# EAGLE board _X2 (EAGLE 8.4.0)
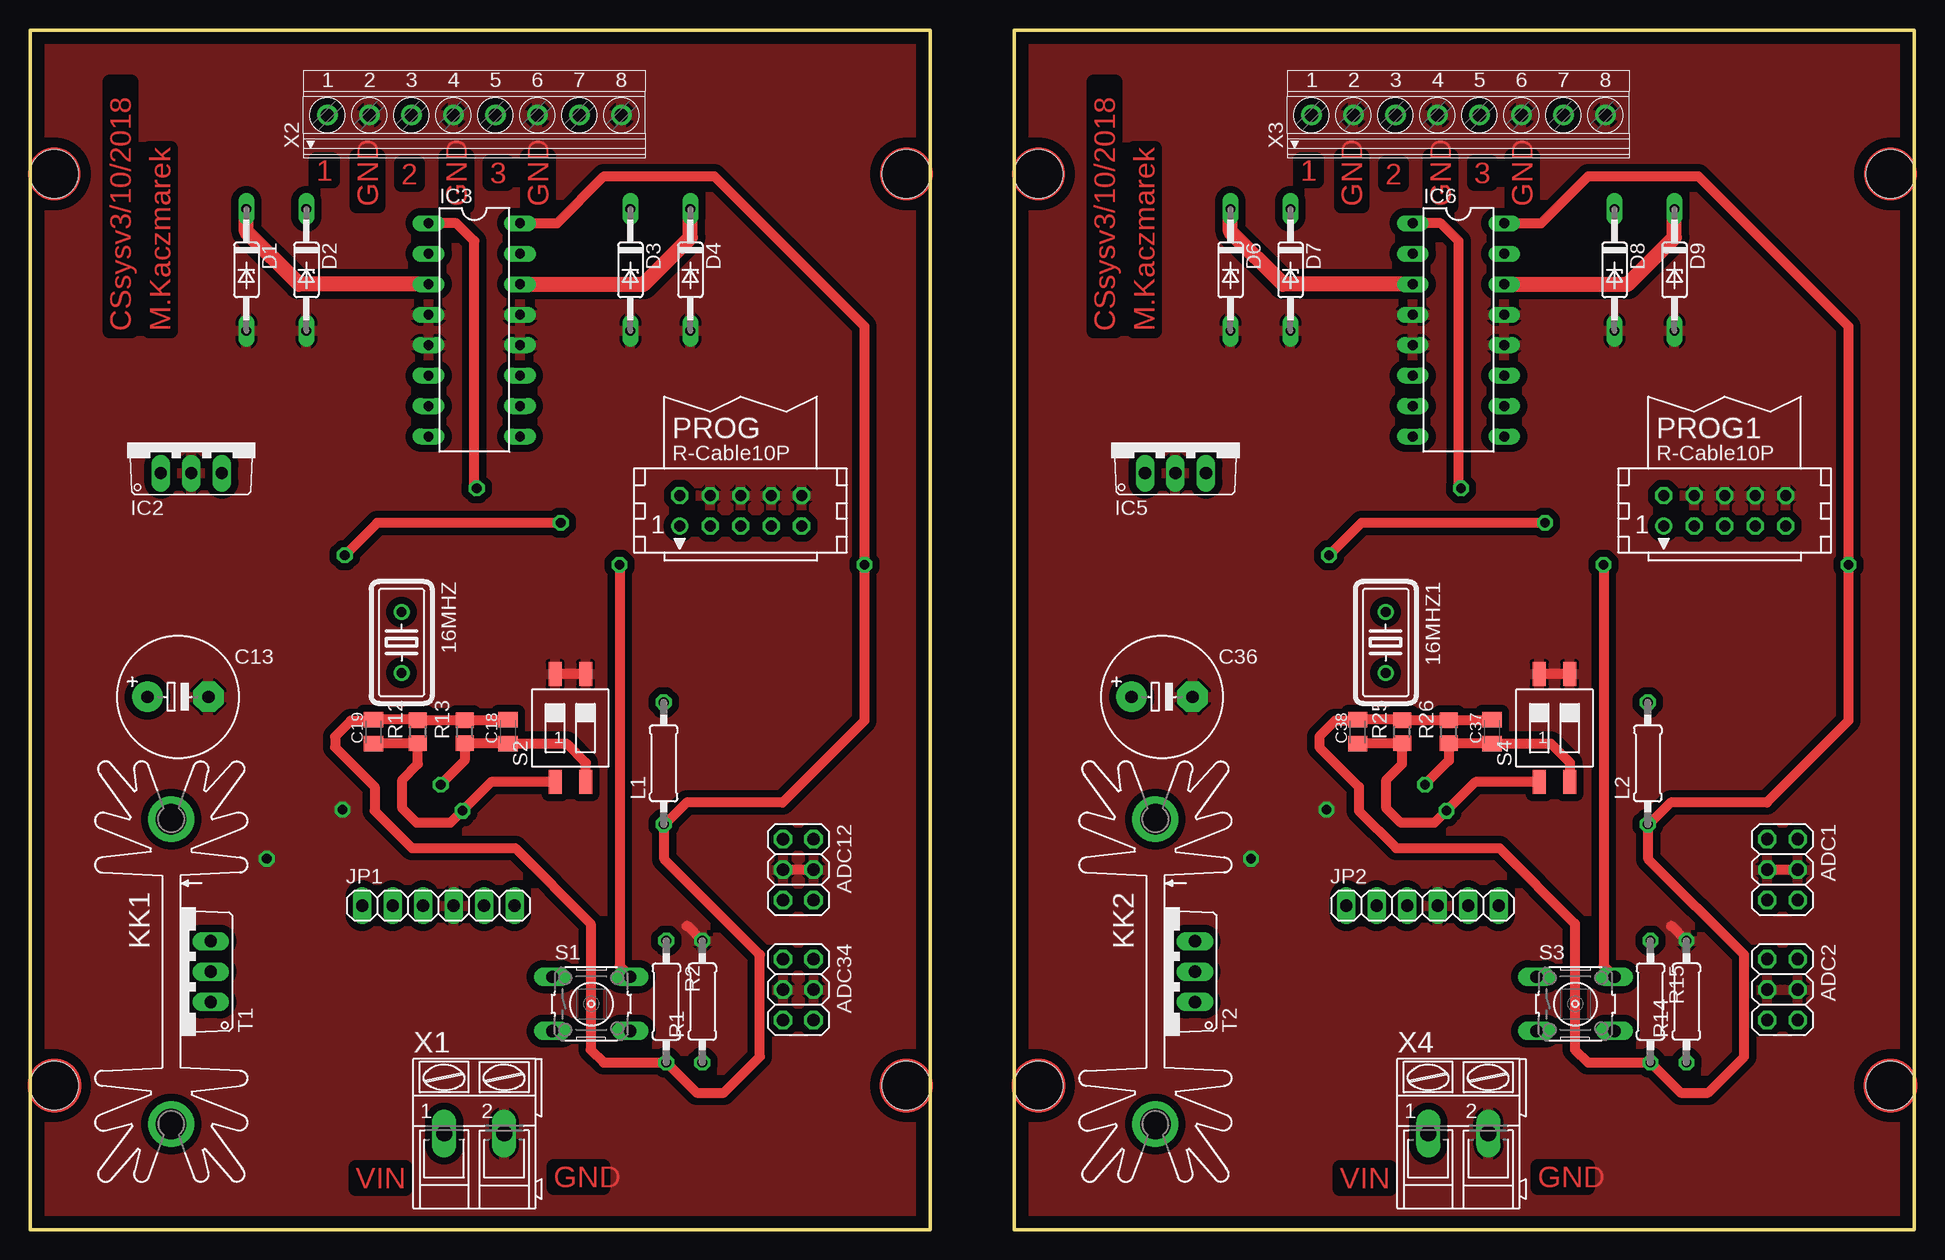
[diagram p0: board, top side]
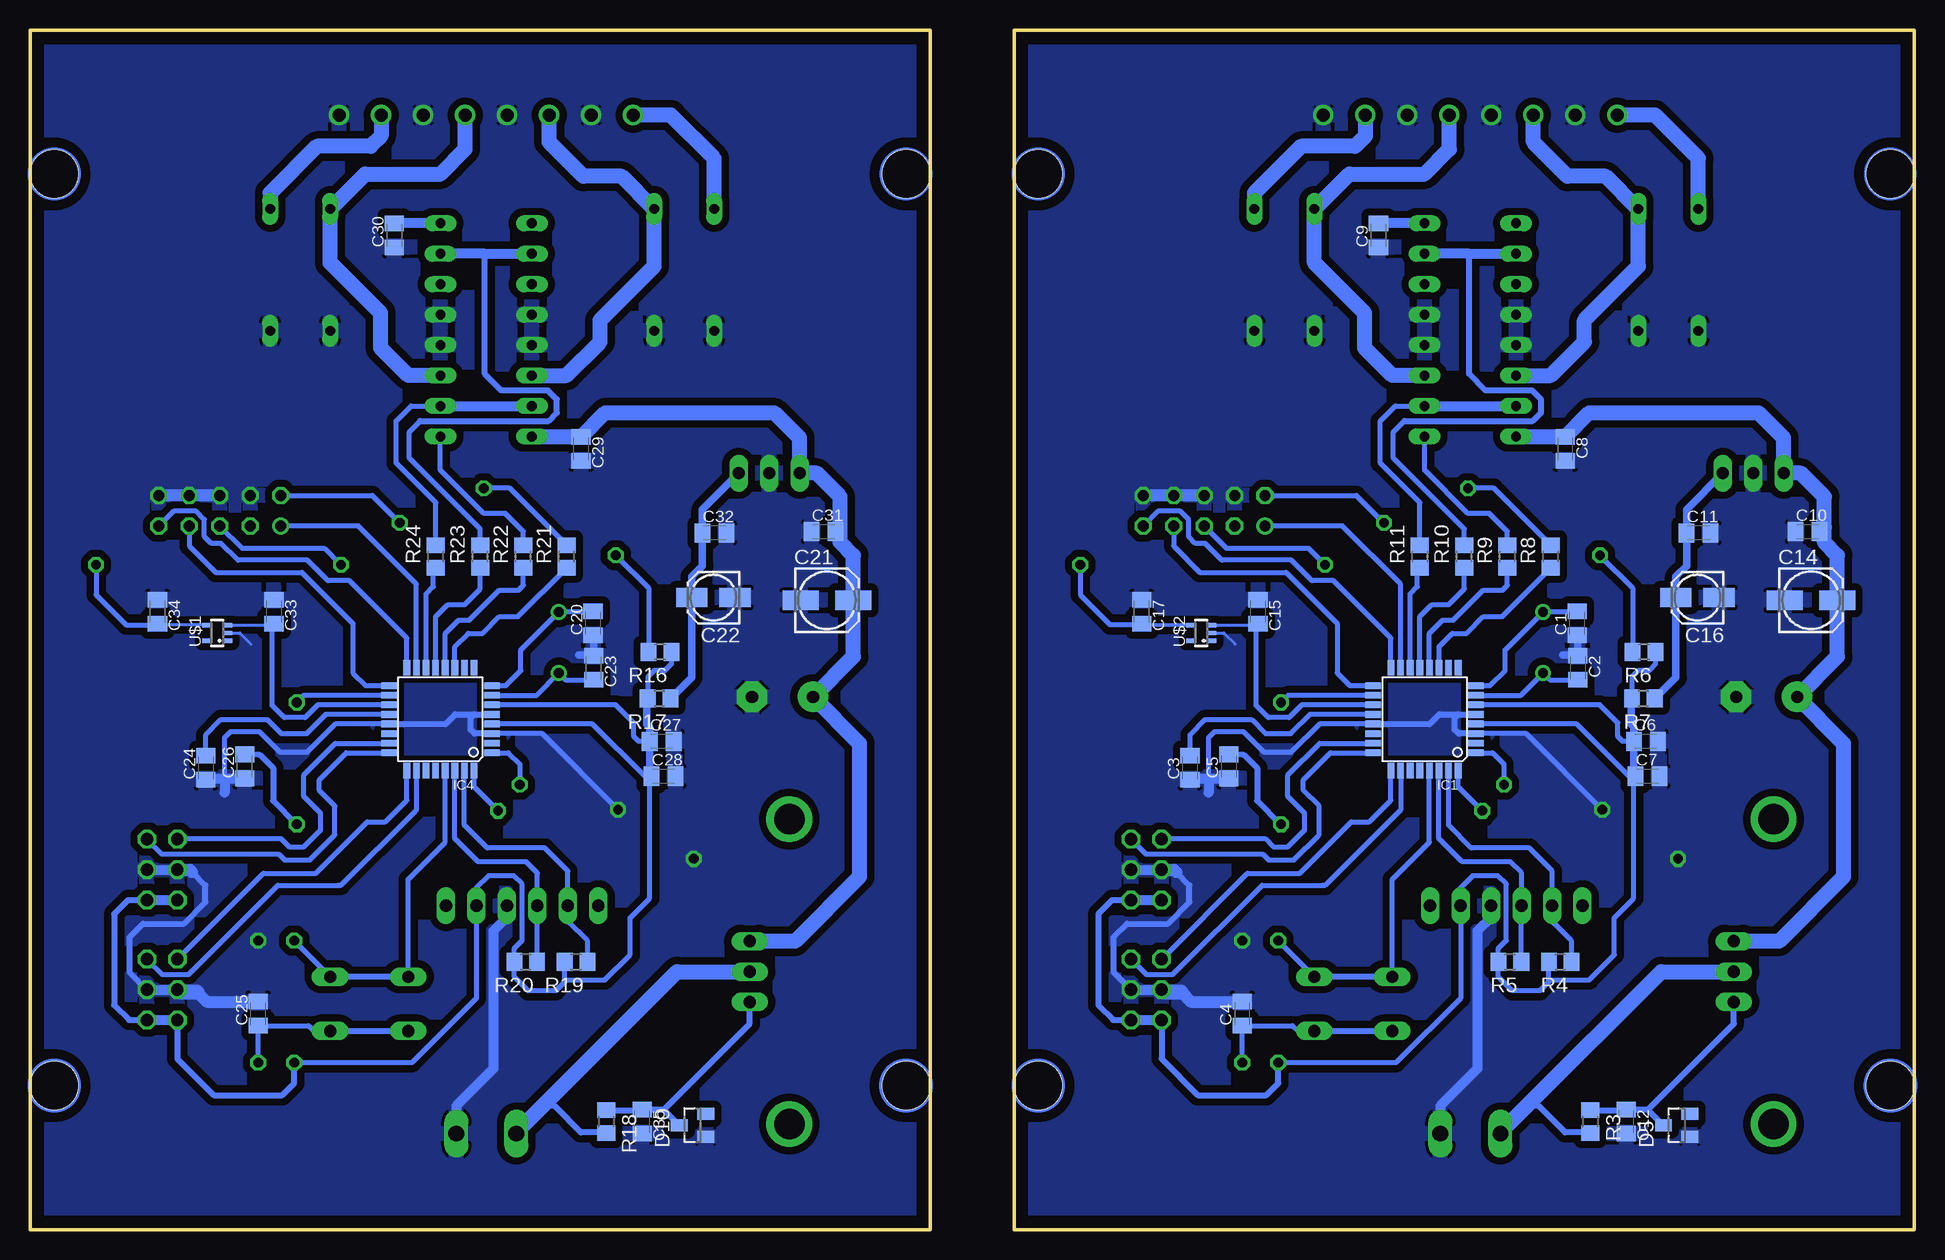
[diagram p1: board, bottom side, seen from below]

Size 157.01 x 100 mm. Coordinates in mm from the lower left corner, seen from the top.
Outline: 0,0 75,0 75,100 0,100 0,0
Outline: 82.01,0 157.01,0 157.01,100 82.01,100 82.01,0
Copper layers (1*16): Top 0.035mm / dielectric 1.5mm / Bottom 0.035mm
Design rules "default": minimum track width 6mil, minimum drill 0.35mm, track to track 6mil, track to pad 6mil, pad to pad 6mil, via to via 6mil, smd to smd 6mil, copper to edge 40mil, drill to drill 6mil, minimum pad ring 10mil, minimum via ring 8mil, stop-mask expansion 4mil, vias tented up to drill 0mil, thermal gap 10mil
Holes 4 mm at 2,12 73,12 73,88 2,88 84.01,12 155.01,12 155.01,88 84.01,88

## Footprints (pad centres in the part's own frame; a part is rotated, then mirrored left to right if it is on the bottom)
HC18U-V = drill 0.813: 1 -2.54,0; 2 2.54,0
2X03 = drill 1.016 octagon: 1 -2.54,-1.27; 2 -2.54,1.27; 3 0,-1.27; 4 0,1.27; 5 2.54,-1.27; 6 2.54,1.27
C0805K = smd 1.3 x 1.6: 1 -1,0; 2 1,0
E5-10,5 = drill 1.016 pad 2.54: + -2.54,0 | drill 1.016 pad 2.54 octagon: - 2.54,0
153CLV-0505 = smd 3 x 1.6: + 2.2,0; - -2.2,0
153CLV-0405 = smd 2.6 x 1.6: + 1.8,0; - -1.8,0
DO35Z10 = drill 0.813 long: A 5.08,0; C -5.08,0
SOT23 = smd 1 x 1.4: 1 -0.95,-1.1; 2 0.95,-1.1; 3 0,1.1
TQFP32-08 = smd 1.27 x 0.559: 1 -4.293,2.8; 2 -4.293,2; 3 -4.293,1.2; 4 -4.293,0.4; 5 -4.293,-0.4; 6 -4.293,-1.2; 7 -4.293,-2; 8 -4.293,-2.8; 17 4.293,-2.8; 18 4.293,-2; 19 4.293,-1.2; 20 4.293,-0.4; 21 4.293,0.4; 22 4.293,1.2; 23 4.293,2; 24 4.293,2.8 | smd 0.559 x 1.27: 9 -2.8,-4.293; 10 -2,-4.293; 11 -1.2,-4.293; 12 -0.4,-4.293; 13 0.4,-4.293; 14 1.2,-4.293; 15 2,-4.293; 16 2.8,-4.293; 25 2.8,4.293; 26 2,4.293; 27 1.2,4.293; 28 0.4,4.293; 29 -0.4,4.293; 30 -1.2,4.293; 31 -2,4.293; 32 -2.8,4.293
TO220V = drill 1.016 long: 1 -2.54,-2.54; 2 0,-2.54; 3 2.54,-2.54
DIL16 = drill 0.813 long: 1 -8.89,-3.81; 2 -6.35,-3.81; 3 -3.81,-3.81; 4 -1.27,-3.81; 5 1.27,-3.81; 6 3.81,-3.81; 7 6.35,-3.81; 8 8.89,-3.81; 9 8.89,3.81; 10 6.35,3.81; 11 3.81,3.81; 12 1.27,3.81; 13 -1.27,3.81; 14 -3.81,3.81; 15 -6.35,3.81; 16 -8.89,3.81
1X06 = drill 1.016 long: 1 -6.35,0; 2 -3.81,0; 3 -1.27,0; 4 1.27,0; 5 3.81,0; 6 6.35,0
SK104-PAD = drill 2.54 pad 3.81: K1 -12.7,-0.762; K2 12.7,-0.762
0207/10 = drill 0.813 octagon: 1 -5.08,0; 2 5.08,0
CON10 = drill 0.914: 1 -5.08,-1.27 | drill 0.914 octagon: 2 -5.08,1.27; 3 -2.54,-1.27; 4 -2.54,1.27; 5 0,-1.27; 6 0,1.27; 7 2.54,-1.27; 8 2.54,1.27; 9 5.08,-1.27; 10 5.08,1.27
R0805 = smd 1.3 x 1.5: 1 -0.95,0; 2 0.95,0
B3F-10XX = drill 1.016 long: 1 -3.251,2.261; 2 3.251,2.261; 3 -3.251,-2.261; 4 3.251,-2.261
SMS-002 = smd 1.092 x 2.007: 1 -1.27,-4.496; 2 1.27,-4.496; 3 1.27,4.496; 4 -1.27,4.496
TO220AV = drill 1.016 long: 1 -2.54,-2.54; 2 0,-2.54; 3 2.54,-2.54
SC70-5L = smd 0.35 x 0.8: 1 -0.65,-0.85; 2 0,-0.85; 3 0.65,-0.85; 4 0.65,0.85; 5 -0.65,0.85
AK300/2 = drill 1.321 long: 1 -2.515,0; 2 2.489,0
1751303 = drill 1.1 pad 1.7: 1 -12.25,-0.1; 2 -8.75,-0.1; 3 -5.25,-0.1; 4 -1.75,-0.1; 5 1.75,-0.1; 6 5.25,-0.1; 7 8.75,-0.1; 8 12.25,-0.1

## Placement (x,y rotation side)
16MHZ  [HC18U-V]  30.94,48.94 270 top
16MHZ1  [HC18U-V]  112.95,48.94 270 top
ADC1  ADC01  [2X03]  146.01,30 270 top
ADC2  ADC23  [2X03]  146.01,20 270 top
ADC12  ADC01  [2X03]  64,30 270 top
ADC34  ADC23  [2X03]  64,20 270 top
C1  22P  [C0805K]  28.09,50.54 90 bottom
C2  22P  [C0805K]  28.04,46.83 270 bottom
C3  100n  [C0805K]  60.36,38.51 90 bottom
C4  100n  [C0805K]  56,18 90 bottom
C5  100n  [C0805K]  57.12,38.61 90 bottom
C6  100n  [C0805K]  22.37,40.7 0 bottom
C7  100n  [C0805K]  22.22,37.8 0 bottom
C8  1u  [C0805K]  29.09,65.08 270 bottom
C9  100n  [C0805K]  44.65,82.88 90 bottom
C10  100n  [C0805K]  8.88,58.18 0 bottom
C11  100n  [C0805K]  17.98,58.07 0 bottom
C12  1uF  [C0805K]  24,9 270 bottom
C13  470uF  [E5-10,5]  12.3,44.4 0 top
C14  10u  [153CLV-0505]  8.6,52.46 0 bottom
C15  22P  [C0805K]  54.68,51.51 270 bottom
C16  1u  [153CLV-0405]  18.07,52.68 180 bottom
C17  22P  [C0805K]  64.39,51.51 270 bottom
C18  100n  [C0805K]  39.8,41.5 90 top
C19  100n  [C0805K]  28.6,41.5 90 top
C20  22P  [C0805K]  110.1,50.54 90 bottom
C21  10u  [153CLV-0505]  90.61,52.46 0 bottom
C22  1u  [153CLV-0405]  100.08,52.68 180 bottom
C23  22P  [C0805K]  110.05,46.83 270 bottom
C24  100n  [C0805K]  142.37,38.51 90 bottom
C25  100n  [C0805K]  138.01,18 90 bottom
C26  100n  [C0805K]  139.13,38.61 90 bottom
C27  100n  [C0805K]  104.38,40.7 0 bottom
C28  100n  [C0805K]  104.23,37.8 0 bottom
C29  1u  [C0805K]  111.1,65.08 270 bottom
C30  100n  [C0805K]  126.66,82.88 90 bottom
C31  100n  [C0805K]  90.89,58.18 0 bottom
C32  100n  [C0805K]  99.99,58.07 0 bottom
C33  22P  [C0805K]  136.69,51.51 270 bottom
C34  22P  [C0805K]  146.4,51.51 270 bottom
C35  1uF  [C0805K]  106.01,9 270 bottom
C36  470uF  [E5-10,5]  94.31,44.4 0 top
C37  100n  [C0805K]  121.81,41.5 90 top
C38  100n  [C0805K]  110.61,41.5 90 top
D1  [DO35Z10]  18,80 270 top
D2  [DO35Z10]  23,80 270 top
D3  [DO35Z10]  50,80 270 top
D4  [DO35Z10]  55,80 270 top
D5  13V  [SOT23]  19.8,8.7 90 bottom
D6  [DO35Z10]  100.01,80 270 top
D7  [DO35Z10]  105.01,80 270 top
D8  [DO35Z10]  132.01,80 270 top
D9  [DO35Z10]  137.01,80 270 top
D10  13V  [SOT23]  101.81,8.7 90 bottom
IC1  MEGA8-AI  [TQFP32-08]  40.81,42.54 180 bottom
IC2  7805TV  [TO220V]  13.42,65.59 0 top
IC3  L293D  [DIL16]  37,75 270 top
IC4  MEGA8-AI  [TQFP32-08]  122.82,42.54 180 bottom
IC5  7805TV  [TO220V]  95.43,65.59 0 top
IC6  L293D  [DIL16]  119.01,75 270 top
JP1  UART  [1X06]  34,27 0 top
JP2  UART  [1X06]  116.01,27 0 top
KK1  SK104-PAD  [SK104-PAD]  12.5,21.5 270 top
KK2  SK104-PAD  [SK104-PAD]  94.51,21.5 270 top
L1  10u  [0207/10]  52.78,38.86 90 top
L2  10u  [0207/10]  134.79,38.86 90 top
PROG  SPI-Prog  [CON10]  59.19,59.92 0 top
PROG1  SPI-Prog  [CON10]  141.2,59.92 0 top
R1  100  [0207/10]  56,19 90 top
R2  10k  [0207/10]  53,19 270 top
R3  1.1k  [R0805]  27,9 270 bottom
R4  4,7k  [R0805]  29.5,22.3 180 bottom
R5  4,7k  [R0805]  33.7,22.3 180 bottom
R6  0  [R0805]  22.52,48.14 180 bottom
R7  0  [R0805]  22.58,44.25 180 bottom
R8  1k  [R0805]  30.3,56.1 90 bottom
R9  1k  [R0805]  33.9,56.1 90 bottom
R10  1k  [R0805]  37.5,56.1 90 bottom
R11  1k  [R0805]  41.2,56.1 90 bottom
R12  10k  [R0805]  32.3,41.5 90 top
R13  10k  [R0805]  36.2,41.5 90 top
R14  100  [0207/10]  138.01,19 90 top
R15  10k  [0207/10]  135.01,19 270 top
R16  0  [R0805]  104.53,48.14 180 bottom
R17  0  [R0805]  104.59,44.25 180 bottom
R18  1.1k  [R0805]  109.01,9 270 bottom
R19  4,7k  [R0805]  111.51,22.3 180 bottom
R20  4,7k  [R0805]  115.71,22.3 180 bottom
R21  1k  [R0805]  112.31,56.1 90 bottom
R22  1k  [R0805]  115.91,56.1 90 bottom
R23  1k  [R0805]  119.51,56.1 90 bottom
R24  1k  [R0805]  123.21,56.1 90 bottom
R25  10k  [R0805]  114.31,41.5 90 top
R26  10k  [R0805]  118.21,41.5 90 top
S1  [B3F-10XX]  46.75,18.81 0 top
S2  SWS002  [SMS-002]  45,41.8 0 top
S3  [B3F-10XX]  128.76,18.81 0 top
S4  SWS002  [SMS-002]  127.01,41.8 0 top
T1  ST13007  [TO220AV]  12.5,21.5 90 top
T2  ST13007  [TO220AV]  94.51,21.5 90 top
U$1  MCP9701  [SC70-5L]  141.42,49.73 90 bottom
U$2  MCP9701  [SC70-5L]  59.41,49.73 90 bottom
X1  [AK300/2]  37,8 0 top
X2  1751303  [1751303]  37,93 0 top
X3  1751303  [1751303]  119.01,93 0 top
X4  [AK300/2]  119.01,8 0 top

## Library data of the parts
16MHZ 16MHZ1 = crystal; OC_FARNELL: unknown; OC_NEWARK: unknown
ADC1 ADC2 ADC12 ADC34 JP1 JP2 = pinhead
C1-C38 L1 L2 R1-R26 = resistor
D1-D10 = diode
IC1 IC4 = atmel; MPN: ATMEGA8-16AU; OC_FARNELL: 9171371; OC_NEWARK: 73M8863
IC2 IC5 = linear
IC3 IC6 = st-microelectronics; MPN: L293D; OC_FARNELL: 9589619; OC_NEWARK: 56P8249
KK1 KK2 = heatsink
PROG PROG1 = con-harting; OC_FARNELL: unknown; OC_NEWARK: unknown
S1 S3 = switch-omron; MPN: B3F-1000; OC_FARNELL: 176432; OC_NEWARK: 36M3542
S2 S4 = smd-special
T1 T2 = transistor
U$1 U$2 = MCP9701T
X1 X4 = con-ptr500; OC_FARNELL: unknown; OC_NEWARK: unknown
X2 X3 = con-phoenix-350; OC_FARNELL: unknown; OC_NEWARK: unknown

## Nets
1Y: D1.C IC3.3 X2.1
1Y1: D6.C IC6.3 X3.1
2Y: D2.C IC3.6 X2.3
2Y1: D7.C IC6.6 X3.3
3Y: D3.C IC3.11 X2.5
3Y1: D8.C IC6.11 X3.5
4Y: D4.C IC3.14 X2.7
4Y1: D9.C IC6.14 X3.7
12EN: IC3.1 R8.2
12EN1: IC6.1 R21.2
34EN: IC3.9 R9.2
34EN1: IC6.9 R22.2
ADC1: ADC12.1 IC1.23
ADC2: ADC12.2 IC1.24
ADC3: ADC34.1 IC1.25
ADC4: ADC34.2 IC1.26
ADC5: ADC2.1 IC4.25
ADC6: C15.2 IC1.19 U$2.3
ADC7: ADC1.1 IC4.23
ADC8: ADC1.2 IC4.24
ADC9: ADC2.2 IC4.26
ADC10: C33.2 IC4.19 U$1.3
AREF: C3.2 IC1.20
AREF1: C24.2 IC4.20
AVCC: IC1.18 L1.2
AVCC1: IC4.18 L2.2
GND: ADC12.3 ADC12.4 ADC34.3 ADC34.4 C1.1 C2.1 C3.1 C4.2 C5.1 C6.2 C7.2 C8.2 C9.1 C10.1 C11.2 C12.2 C13.- C14.- C15.1 C16.- C17.1 D1.A D2.A D3.A D4.A D5.1 IC1.3 IC1.5 IC1.21 IC2.2 IC3.4 IC3.5 IC3.12 IC3.13 JP1.4 PROG.4 PROG.6 PROG.8 PROG.10 R1.2 S2.3 S2.4 U$2.2 X1.2 X2.2 X2.4 X2.6 X2.8
GND1: ADC1.3 ADC1.4 ADC2.3 ADC2.4 C20.1 C21.- C22.- C23.1 C24.1 C25.2 C26.1 C27.2 C28.2 C29.2 C30.1 C31.1 C32.2 C33.1 C34.1 C35.2 C36.- D6.A D7.A D8.A D9.A D10.1 IC4.3 IC4.5 IC4.21 IC5.2 IC6.4 IC6.5 IC6.12 IC6.13 JP2.4 PROG1.4 PROG1.6 PROG1.8 PROG1.10 R14.2 S4.3 S4.4 U$1.2 X3.2 X3.4 X3.6 X3.8 X4.2
MISO: IC1.16 PROG.9
MISO1: IC4.16 PROG1.9
MOSI: IC1.15 PROG.1
MOSI1: IC4.15 PROG1.1
N$1: 16MHZ.2 C2.2 IC1.7
N$2: 16MHZ.1 C1.2 IC1.8
N$3: IC1.14 R11.1
N$4: IC1.13 R10.1
N$5: PROG.2 R6.2
N$6: C4.1 R1.1 S1.3 S1.4
N$7: R3.2 T1.2 X1.1
N$8: C12.1 D5.3 R3.1 T1.1
N$9: IC1.12 R9.1
N$10: IC1.11 R8.1
N$11: C19.1 IC1.32 R12.1 S2.1
N$12: C18.1 IC1.1 R13.1 S2.2
N$13: 16MHZ1.2 C23.2 IC4.7
N$14: 16MHZ1.1 C20.2 IC4.8
N$15: C25.1 R14.1 S3.3 S3.4
N$16: C22.+ C32.1 IC5.3 R17.1
N$17: PROG1.2 R16.2
N$18: R18.2 T2.2 X4.1
N$19: C35.1 D10.3 R18.1 T2.1
N$20: IC4.14 R24.1
N$21: IC4.13 R23.1
N$22: C11.1 C16.+ IC2.3 R7.1
N$23: IC4.12 R22.1
N$24: IC4.11 R21.1
N$25: C38.1 IC4.32 R25.1 S4.1
N$26: C37.1 IC4.1 R26.1 S4.2
OC1A: IC3.2 IC3.15 R10.2
OC1A1: IC6.2 IC6.15 R23.2
OC1B: IC3.7 IC3.10 R11.2
OC1B1: IC6.7 IC6.10 R24.2
RST: IC1.29 PROG.5 R2.1 S1.1 S1.2
RST1: IC4.29 PROG1.5 R15.1 S3.1 S3.2
RX: IC1.30 JP1.3 R5.1
RX1: IC4.30 JP2.3 R20.1
SCK: IC1.17 PROG.7
SCK1: IC4.17 PROG1.7
TX: IC1.31 JP1.2 R4.1
TX1: IC4.31 JP2.2 R19.1
VCC: ADC12.5 ADC12.6 ADC34.5 ADC34.6 C5.2 C6.1 C7.1 C9.2 C17.2 C18.2 C19.2 IC1.4 IC1.6 IC3.16 JP1.5 L1.1 R2.2 R4.2 R5.2 R6.1 R7.2 R12.2 R13.2 U$2.4
VCC1: C21.+ C29.1 C31.2 C36.+ IC5.1 IC6.8 T2.3
VCC2: C8.1 C10.2 C13.+ C14.+ IC2.1 IC3.8 T1.3
VCC3: ADC1.5 ADC1.6 ADC2.5 ADC2.6 C26.2 C27.1 C28.1 C30.2 C34.2 C37.2 C38.2 IC4.4 IC4.6 IC6.16 JP2.5 L2.1 R15.2 R16.1 R17.2 R19.2 R20.2 R25.2 R26.2 U$1.4

## Tracks (layer width: path | path; a pad name or v marks a point on that pad's centre or on a via)
1Y
  Top 1.27: IC3.3 22.39,78.81 18,83.2 D1.C
  Bottom 1.27: D1.C 18,89.3 21.6,92.9 X2.1
1Y1
  Top 1.27: IC6.3 104.4,78.81 100.01,83.2 D6.C
  Bottom 1.27: D6.C 100.01,89.3 103.61,92.9 X3.1
2Y
  Bottom 1.27: IC3.6 30.31,71.19 27.5,74 27.5,75.8 23,80.3 D2.C 25.72,87.8 28.9,87.8 31.75,90.65 X2.3
2Y1
  Bottom 1.27: IC6.6 112.32,71.19 109.51,74 109.51,75.8 105.01,80.3 D7.C 107.73,87.8 110.91,87.8 113.76,90.65 X3.3
3Y
  Bottom 1.27: IC3.11 43.49,71.19 45.8,73.5 45.8,76.4 50,80.6 D3.C 47.08,88 40.8,88 38.75,90.05 X2.5
3Y1
  Bottom 1.27: IC6.11 125.5,71.19 127.81,73.5 127.81,76.4 132.01,80.6 D8.C 129.09,88 122.81,88 120.76,90.05 X3.5
4Y
  Top 1.27: IC3.14 51.1,78.8 55,82.7 D4.C
  Bottom 1.27: D4.C 55,86.4 51.1,90.3 46.6,90.3 45.75,91.15 X2.7
4Y1
  Top 1.27: IC6.14 133.11,78.8 137.01,82.7 D9.C
  Bottom 1.27: D9.C 137.01,86.4 133.11,90.3 128.61,90.3 127.76,91.15 X3.7
12EN  (via drill 0.8 pad 1.3)
  Top 0.813: v37.2,61.8 37.01,62 37.01,82.4 35.51,83.89 IC3.1
  Bottom 0.406: R8.2 35.05,61.8 v37.2,61.8
12EN1  (via drill 0.8 pad 1.3)
  Top 0.813: v119.21,61.8 119.02,62 119.02,82.4 117.52,83.89 IC6.1
  Bottom 0.406: R21.2 117.06,61.8 v119.21,61.8
34EN
  Bottom 0.406: R9.2 33.9,58.2 35.4,59.7 37.2,59.7 40.81,63.31 IC3.9
34EN1
  Bottom 0.406: R22.2 115.91,58.2 117.41,59.7 119.21,59.7 122.82,63.31 IC6.9
ADC1
  Bottom 0.406: ADC12.1 62.67,32.6 54.1,32.6 53.4,31.9 52.2,31.9 50.8,33.3 50.8,34.7 52.2,36.1 52.2,37.9 49.56,40.54 IC1.23
ADC2
  Bottom 0.406: ADC12.2 64.03,31.3 54.3,31.3 53.8,30.8 51.7,30.8 49.6,32.9 49.6,35.3 50.9,36.6 50.9,37.5 48.66,39.74 IC1.24
ADC3
  Bottom 0.406: ADC34.1 55.57,29.7 51.2,29.7 46.9,34 45.4,34 43.61,35.79 IC1.25
ADC4
  Bottom 0.406: ADC34.2 63.99,21.26 61.8,21.26 54.36,28.7 49.1,28.7 | 49.3,28.7 49.1,28.7 | 43.05,34.75 49.1,28.7 | 43.05,34.75 43,34.8 | IC1.26 42.81,34.99 43.05,34.75
ADC5
  Bottom 0.406: ADC2.1 137.58,29.7 133.21,29.7 128.91,34 127.41,34 125.62,35.79 IC4.25
ADC6
  Bottom 0.254: U$2.3 54.94,50.38 54.86,50.3
  Bottom 0.406: IC1.19 51.03,43.74 52.09,42.67 53.82,42.67 54.86,43.71 54.86,50.3 54.86,50.38 | 54.86,50.38 54.72,50.53 C15.2 | 54.86,50.38
ADC7
  Bottom 0.406: ADC1.1 144.68,32.6 136.11,32.6 135.41,31.9 134.21,31.9 132.81,33.3 132.81,34.7 134.21,36.1 134.21,37.9 131.57,40.54 IC4.23
ADC8
  Bottom 0.406: ADC1.2 146.04,31.3 136.31,31.3 135.81,30.8 133.71,30.8 131.61,32.9 131.61,35.3 132.91,36.6 132.91,37.5 130.67,39.74 IC4.24
ADC9
  Bottom 0.406: ADC2.2 146,21.26 143.81,21.26 136.37,28.7 131.11,28.7 | 131.31,28.7 131.11,28.7 | 125.06,34.75 131.11,28.7 | 125.06,34.75 125.01,34.8 | IC4.26 124.82,34.99 125.06,34.75
ADC10
  Bottom 0.254: U$1.3 136.96,50.38 136.87,50.3
  Bottom 0.406: IC4.19 133.04,43.74 134.1,42.67 135.83,42.67 136.87,43.71 136.87,50.3 136.87,50.38 | 136.87,50.38 136.73,50.53 C33.2 | 136.87,50.38
AREF
  Bottom 0.406: IC1.20 50.35,42.94 51.94,41.35 54.07,41.35 55.22,42.5 59.1,42.5 60.36,41.24 C3.2
AREF1
  Bottom 0.406: IC4.20 132.36,42.94 133.95,41.35 136.08,41.35 137.23,42.5 141.11,42.5 142.37,41.24 C24.2
AVCC
  Bottom 0.406: IC1.18 52.18,44.54 L1.2
AVCC1
  Bottom 0.406: IC4.18 134.19,44.54 L2.2
GND  (via drill 0.8 pad 1.3)
  Top 0.813: S2.3 S2.4 | R1.2 54.78,25.3 54.7,25.3 | ADC12.4 ADC12.3
  Bottom 0.254: U$2.2 57.53,49.73 56.6,48.8
  Bottom 0.406: IC1.21 49.56,42.14 51.9,39.8 54.2,39.8 55.9,41.5 58.3,41.5 58.8,41 58.8,37.61 | 36.58,41.4 IC1.3 32.34,41.34 v26,35 | C5.1 58.8,37.61 | 58.8,37.61 60.25,37.61
  Bottom 0.508: 38.01,42.94 IC1.5 | 38.01,42.94 38.3,42.65 38.3,41.68 37.96,41.34 IC1.3 | IC1.21 40.38,42.14 39.58,42.94 38.01,42.94 | ADC34.4 66.7,21.43 66.7,24.4 65.6,25.5 62.2,25.5 60.4,27.3 60.4,28.7 61.5,29.8 | 61.7,30 62.5,30 ADC12.3
  Bottom 0.61: C1.1 28.04,49.49 C2.1 28.11,47.9 29.3,47.9
  Bottom 0.813: 58.8,37.61 58.8,36.4 | C3.1 60.25,37.61 C5.1 | JP1.4 35.27,26.03 36.4,24.9 36.4,13.4 39.49,10.31 X1.2 | ADC12.4 62.5,30 | ADC34.4 ADC34.3
  Bottom 1.016: PROG.6 PROG.8 PROG.10 | ADC12.3 62.5,30 61.7,30 61.5,29.8 | 61.1,19.8 60.3,19 C4.2
  Bottom 1.27: ADC34.3 62.53,19.8 61.1,19.8
  other vias: 19.7,30.9
  pour Bottom (isolate 0.61): 0,0 0,100 75,100 75,0
  pour Top (isolate 0.61): 0,0 0,100 75,100 75,0
GND1  (via drill 0.8 pad 1.3)
  Top 0.813: S4.3 S4.4 | R14.2 136.79,25.3 136.71,25.3 | ADC1.4 ADC1.3
  Bottom 0.254: U$1.2 139.54,49.73 138.61,48.8
  Bottom 0.406: IC4.21 131.57,42.14 133.91,39.8 136.21,39.8 137.91,41.5 140.31,41.5 140.81,41 140.81,37.61 | 118.59,41.4 IC4.3 114.35,41.34 v108.01,35 | C26.1 140.81,37.61 | 140.81,37.61 142.26,37.61
  Bottom 0.508: 120.02,42.94 IC4.5 | 120.02,42.94 120.31,42.65 120.31,41.68 119.97,41.34 IC4.3 | IC4.21 122.39,42.14 121.59,42.94 120.02,42.94 | ADC2.4 148.71,21.43 148.71,24.4 147.61,25.5 144.21,25.5 142.41,27.3 142.41,28.7 143.51,29.8 | 143.71,30 144.51,30 144.7,30 ADC1.3
  Bottom 0.61: C20.1 110.05,49.49 C23.1 110.12,47.9 111.31,47.9
  Bottom 0.813: 140.81,37.61 140.81,36.4 | C24.1 142.26,37.61 C26.1 | JP2.4 117.28,26.03 118.41,24.9 118.41,13.4 121.5,10.31 X4.2 | ADC2.4 ADC2.3 | ADC1.4 144.7,30
  Bottom 1.016: PROG1.6 PROG1.8 PROG1.10 | ADC1.3 144.7,30 143.71,30 143.51,29.8 | 143.11,19.8 142.31,19 C25.2
  Bottom 1.27: ADC2.3 144.54,19.8 143.11,19.8 | 144.7,30 144.51,30
  other vias: 101.71,30.9
  pour Bottom (isolate 0.61): 82.01,0 82.01,100 157.01,100 157.01,0
  pour Top (isolate 0.61): 82.01,0 82.01,100 157.01,100 157.01,0
MISO
  Bottom 0.406: IC1.16 43.61,49.31 48.4,54.1 50.2,54.1 51.9,55.8 57.7,55.8 59.1,57.2 59.9,57.2 60.48,57.78 60.48,59.21 61.16,59.89 63.03,59.89 PROG.9
MISO1
  Bottom 0.406: IC4.16 125.62,49.31 130.41,54.1 132.21,54.1 133.91,55.8 139.71,55.8 141.11,57.2 141.91,57.2 142.49,57.78 142.49,59.21 143.17,59.89 145.04,59.89 PROG1.9
MOSI
  Bottom 0.406: IC1.15 42.81,53.81 47.65,58.65 PROG.1
MOSI1
  Bottom 0.406: IC4.15 124.82,53.81 129.66,58.65 PROG1.1
N$1
  Bottom 0.406: C2.2 30.37,45.83 16MHZ.2 32.8,44.54 IC1.7
N$2
  Bottom 0.406: IC1.8 35.36,45.34 34.1,46.6 34.1,48.32 16MHZ.1 30.88,51.54 C1.2
N$3
  Bottom 0.406: IC1.14 42.01,52.99 41.4,53.6 41.4,54.95 R11.1
N$4
  Bottom 0.406: IC1.13 41.21,51.09 40.2,52.1 38.8,52.1 37.5,53.4 R10.1
N$5  (via drill 0.8 pad 1.3)
  Top 0.813: v44.2,58.9 28.9,58.9 v26.2,56.2
  Bottom 0.406: PROG.2 46.49,61.19 v44.2,58.9 | v26.2,56.2 23.47,53.47 R6.2
N$6
  Bottom 0.406: S1.4 51.35,16.55 51.8,17 C4.1 R1.1
  Bottom 0.508: S1.4 S1.3
N$7
  Bottom 0.508: R3.2 27.05,8.1 29.1,8.1 31.3,10.3 32.3,10.3
  Bottom 1.27: X1.1 34.49,8.12 32.3,10.3 21.1,21.5 T1.2
N$8
  Bottom 0.508: C12.1 24.15,10.05 | R3.1 24.05,9.95 C12.1 | D5.3 22.2,10 | 22.2,10 C12.1 | T1.1 15.04,17.16 22.2,10
N$9
  Bottom 0.406: IC1.12 40.4,46.84 40.4,49.7 39.3,50.8 38.4,50.8 35.9,53.3 34.3,53.3 33.9,53.7 R9.1
N$10
  Bottom 0.406: R8.1 34.35,51.1 35.9,51.1 37.3,49.7 38.5,49.7 39.6,48.6 39.6,46.84 IC1.11
N$11  (via drill 0.8 pad 1.3)
  Top 0.813: S2.1 38.4,37.3 v36,34.9 35,33.9 32.2,33.9 31,35.1 31,37.5 32.3,38.8 R12.1 32.25,40.5 C19.1
  Bottom 0.406: v36,34.9 38.01,36.91 IC1.32
N$12  (via drill 0.8 pad 1.3)
  Top 0.813: S2.2 46.3,37.33 46.3,38.9 44.7,40.5 C18.1 | 39.95,40.55 C18.1 | C18.1 36.25,40.5 R13.1 36.2,39.1 v34.2,37.1
  Bottom 0.406: v34.2,37.1 34.2,38.8 35.14,39.74 IC1.1
N$13
  Bottom 0.406: C23.2 112.38,45.83 16MHZ1.2 114.81,44.54 IC4.7
N$14
  Bottom 0.406: IC4.8 117.37,45.34 116.11,46.6 116.11,48.32 16MHZ1.1 112.89,51.54 C20.2
N$15
  Bottom 0.406: S3.4 133.36,16.55 133.81,17 C25.1 R14.1
  Bottom 0.508: S3.4 S3.3
N$16
  Bottom 0.61: R17.1 101.88,46.01 C22.+ 101.88,54.43 100.99,55.32 C32.1 100.99,60.03 IC5.3
N$17  (via drill 0.8 pad 1.3)
  Top 0.813: v126.21,58.9 110.91,58.9 v108.21,56.2
  Bottom 0.406: PROG1.2 128.5,61.19 v126.21,58.9 | v108.21,56.2 105.48,53.47 R16.2
N$18
  Bottom 0.508: R18.2 109.06,8.1 111.11,8.1 113.31,10.3 114.31,10.3
  Bottom 1.27: X4.1 116.5,8.12 114.31,10.3 103.11,21.5 T2.2
N$19
  Bottom 0.508: C35.1 106.16,10.05 | R18.1 106.06,9.95 C35.1 | D10.3 104.21,10 | 104.21,10 C35.1 | T2.1 97.05,17.16 104.21,10
N$20
  Bottom 0.406: IC4.14 124.02,52.99 123.41,53.6 123.41,54.95 R24.1
N$21
  Bottom 0.406: IC4.13 123.22,51.09 122.21,52.1 120.81,52.1 119.51,53.4 R23.1
N$22
  Bottom 0.61: R7.1 19.87,46.01 C16.+ 19.87,54.43 18.98,55.32 C11.1 18.98,60.03 IC2.3
N$23
  Bottom 0.406: IC4.12 122.41,46.84 122.41,49.7 121.31,50.8 120.41,50.8 117.91,53.3 116.31,53.3 115.91,53.7 R22.1
N$24
  Bottom 0.406: R21.1 116.36,51.1 117.91,51.1 119.31,49.7 120.51,49.7 121.61,48.6 121.61,46.84 IC4.11
N$25  (via drill 0.8 pad 1.3)
  Top 0.813: S4.1 120.42,37.3 v118.01,34.9 117.01,33.9 114.21,33.9 113.01,35.1 113.01,37.5 114.31,38.8 R25.1 114.26,40.5 C38.1
  Bottom 0.406: v118.01,34.9 120.02,36.91 IC4.32
N$26  (via drill 0.8 pad 1.3)
  Top 0.813: S4.2 128.31,37.33 128.31,38.9 126.71,40.5 C37.1 | 121.96,40.55 C37.1 | C37.1 118.26,40.5 R26.1 118.21,39.1 v116.21,37.1
  Bottom 0.406: v116.21,37.1 116.21,38.8 117.15,39.74 IC4.1
OC1A
  Bottom 0.406: 42.5,67.4 43.4,66.5 43.4,64.3 37.5,58.4 R10.2
  Bottom 0.508: 42.5,67.4 31.8,67.4 31.1,68.1 31.1,69.2 31.85,69.95 35.74,69.95 37.1,71.32 37.1,81.35
  Bottom 0.813: IC3.15 37.1,81.35 IC3.2
OC1A1
  Bottom 0.406: 124.51,67.4 125.41,66.5 125.41,64.3 119.51,58.4 R23.2
  Bottom 0.508: 124.51,67.4 113.81,67.4 113.11,68.1 113.11,69.2 113.86,69.95 117.75,69.95 119.11,71.32 119.11,81.35
  Bottom 0.813: IC6.15 119.11,81.35 IC6.2
OC1B
  Bottom 0.406: IC3.10 43.25,68.65 44.5,67.4 44.5,63.9 41.2,60.6 R11.2
  Bottom 0.813: IC3.10 IC3.7
OC1B1
  Bottom 0.406: IC6.10 125.26,68.65 126.51,67.4 126.51,63.9 123.21,60.6 R24.2
  Bottom 0.813: IC6.10 IC6.7
RST  (via drill 0.8 pad 1.3)
  Top 0.813: v49.1,55.4 49.1,21.97 S1.2
  Bottom 0.406: S1.1 43.5,29.2 40.41,32.29 IC1.29 | PROG.5 57.34,56.8 50.5,56.8 v49.1,55.4 | S1.2 53,24.07 R2.1
  Bottom 0.508: S1.1 S1.2
RST1  (via drill 0.8 pad 1.3)
  Top 0.813: v131.11,55.4 131.11,21.97 S3.2
  Bottom 0.406: S3.1 125.51,29.2 122.42,32.29 IC4.29 | PROG1.5 139.35,56.8 132.51,56.8 v131.11,55.4 | S3.2 135.01,24.07 R15.1
  Bottom 0.508: S3.1 S3.2
RX
  Bottom 0.406: IC1.30 39.61,32.6 37.67,30.66 33.68,30.66 32.73,29.71 JP1.3 32.7,26.97 32.75,26.92 R5.1
RX1
  Bottom 0.406: IC4.30 121.62,32.6 119.68,30.66 115.69,30.66 114.74,29.71 JP2.3 114.71,26.97 114.76,26.92 R20.1
SCK
  Bottom 0.406: PROG.7 61.73,56.98 59.54,54.79 52.35,54.79 48.1,50.54 48.1,46.4 47.04,45.34 IC1.17
SCK1
  Bottom 0.406: PROG1.7 143.74,56.98 141.55,54.79 134.36,54.79 130.11,50.54 130.11,46.4 129.05,45.34 IC4.17
TX
  Bottom 0.406: IC1.31 38.81,33.71 36.9,31.8 32.1,31.8 30.19,29.89 JP1.2 30.19,25.69 28.55,24.05 R4.1
TX1
  Bottom 0.406: IC4.31 120.82,33.71 118.91,31.8 114.11,31.8 112.2,29.89 JP2.2 112.2,25.69 110.56,24.05 R19.1
VCC  (via drill 0.8 pad 1.3)
  Top 0.406: 52.83,33.73 L1.1
  Top 0.813: IC3.16 43.89,83.89 47.8,87.8 57,87.8 69.5,75.3 v69.5,55.4 69.5,42.4 62.7,35.6 54.7,35.6 52.83,33.73 52.83,30.87 60.8,22.9 60.8,14.4 57.8,11.4 55.52,11.4 R2.2 47.78,13.92 46.7,15 46.7,25.5 40.4,31.8 31.8,31.8 28.7,34.9 28.7,36.9 25.4,40.2 25.4,41.1 26.7,42.4 28.5,42.4 C19.2 32.25,42.5 R12.2 R13.2 39.75,42.45 C18.2
  Bottom 0.305: U$2.4 64.48,50.38 64.5,50.4
  Bottom 0.406: IC1.6 26.21,43.74 24.7,42.23 24.7,41.1 24.3,40.7 C6.1 | IC1.4 28.14,42.14 23.8,37.8 23.3,37.8 | R2.2 52.98,13.9 43.2,13.9 37.81,19.29 JP1.5 37.81,28.49 36.8,29.5 34.7,29.5 34,28.8 34,24.1 34.65,23.45 R5.2 34.65,21.05 33.5,19.9 31.2,19.9 30.5,20.6 | v69.5,55.4 69.5,52.9 67,50.4 64.5,50.4 C17.2 | R4.2 30.5,22.25 30.5,20.6 | 30.5,20.6 30.3,20.8 27.1,20.8 25,22.9 25,26 23.38,27.62 23.38,37.72 23.3,37.8 | 23.3,37.8 C7.1 | R6.1 21.57,47.13 22.1,46.6 23,46.6 23.53,46.07 R7.2
  Bottom 0.508: IC1.6 | C5.2 55.84,39.56 54.76,38.48 54.76,35.76 L1.1 | ADC34.5 62.73,14.23 59.7,11.2 54,11.2 53,12.2 R2.2 | ADC34.6 66.76,17.46 68,18.7 68,26.3 66.84,27.46 ADC12.6
  Bottom 0.61: C6.1 23.33,40.94 | C6.1 23.37,37.95 C7.1 | R7.2 23.6,44.18 23.6,42.1 23.37,41.87 C6.1
  Bottom 0.813: IC3.16 44.64,83.89 C9.2 | ADC34.6 ADC34.5 | ADC12.6 ADC12.5
VCC1
  Bottom 1.27: T2.3 93.27,24.04 87.91,29.4 87.91,40.54 C36.+ 88.41,47.76 C21.+ 88.41,56.2 89.51,57.3 89.51,58.56 | IC6.8 111.13,66.11 C29.1 109.08,68.1 95.01,68.1 92.89,65.98 IC5.1 91.46,63.05 89.51,61.1 89.51,58.56 | 89.51,58.56 C31.2
VCC2
  Bottom 1.27: T1.3 11.26,24.04 5.9,29.4 5.9,40.54 C13.+ 6.4,47.76 C14.+ 6.4,56.2 7.5,57.3 7.5,58.56 | IC3.8 29.12,66.11 C8.1 27.07,68.1 13,68.1 10.88,65.98 IC2.1 9.45,63.05 7.5,61.1 7.5,58.56 | 7.5,58.56 C10.2
VCC3  (via drill 0.8 pad 1.3)
  Top 0.406: 134.84,33.73 L2.1
  Top 0.813: IC6.16 125.9,83.89 129.81,87.8 139.01,87.8 151.51,75.3 v151.51,55.4 151.51,42.4 144.71,35.6 136.71,35.6 134.84,33.73 134.84,30.87 142.81,22.9 142.81,14.4 139.81,11.4 137.53,11.4 R15.2 129.79,13.92 128.71,15 128.71,25.5 122.41,31.8 113.81,31.8 110.71,34.9 110.71,36.9 107.41,40.2 107.41,41.1 108.71,42.4 110.51,42.4 C38.2 114.26,42.5 R25.2 R26.2 121.76,42.45 C37.2
  Bottom 0.254: U$1.4 146.22,50.38
  Bottom 0.406: 146.22,50.38 146.37,50.49 | 146.37,50.49 C34.2 | IC4.6 108.22,43.74 106.71,42.23 106.71,41.1 106.31,40.7 C27.1 | IC4.4 110.15,42.14 105.81,37.8 105.31,37.8 | R15.2 134.99,13.9 125.21,13.9 119.82,19.29 JP2.5 119.82,28.49 118.81,29.5 116.71,29.5 116.01,28.8 116.01,24.1 116.66,23.45 R20.2 116.66,21.05 115.51,19.9 113.21,19.9 112.51,20.6 | v151.51,55.4 151.51,52.9 149.01,50.4 146.47,50.4 146.37,50.49 | R19.2 112.51,22.25 112.51,20.6 | 112.51,20.6 112.31,20.8 109.11,20.8 107.01,22.9 107.01,26 105.39,27.62 105.39,37.72 105.31,37.8 | 105.31,37.8 C28.1 | R16.1 103.58,47.13 104.11,46.6 105.01,46.6 105.54,46.07 R17.2
  Bottom 0.508: IC4.6 | C26.2 137.85,39.56 136.77,38.48 136.77,35.76 L2.1 | ADC2.5 144.74,14.23 141.71,11.2 136.01,11.2 135.01,12.2 R15.2 | ADC2.6 148.77,17.46 150.01,18.7 150.01,26.3 148.85,27.46 ADC1.6
  Bottom 0.61: C27.1 105.34,40.94 | C27.1 105.38,37.95 C28.1 | R17.2 105.61,44.18 105.61,42.1 105.38,41.87 C27.1
  Bottom 0.813: IC6.16 126.65,83.89 C30.2 | ADC2.6 ADC2.5 | ADC1.6 ADC1.5
(copper drawn outside any net)
  shapes: Bottom circle x8, Top circle x8

## Text on the board
Top: 1 | 2 | 3 | 1 | 2 | 3 | GND | GND | GND | GND | GND | GND | CSsysv3/10/2018 | M.Kaczmarek | CSsysv3/10/2018 | M.Kaczmarek | VIN | GND | VIN | GND
_tnames: X2 | X2 | IC3 | IC3 | D1 | D2 | D3 | D4 | D1 | D2 | D3 | D4 | PROG | PROG | IC2 | IC2 | 16MHZ | 16MHZ | C13 | C13 | C19 | R12 | R13 | C18 | C19 | R12 | R13 | C18 | S2 | S2 | L1 | L1 | ADC12 | ADC12 | KK1 | JP1 | KK1 | JP1 | ADC34 | ADC34 | S1 | R2 | S1 | R2 | T1 | T1 | R1 | R1 | X1 | X1
_bnames: C9 | C9 | C8 | C8 | C10 | C10 | C11 | C11 | C14 | R8 | R9 | R10 | R11 | C14 | R8 | R9 | R10 | R11 | C15 | C17 | C15 | C17 | C16 | C16 | C1 | C1 | U$2 | U$2 | C2 | C2 | R6 | R6 | R7 | R7 | C6 | C6 | C7 | C7 | IC1 | C5 | C3 | IC1 | C5 | C3 | R4 | R5 | R4 | R5 | C4 | C4 | C12 | C12 | R3 | R3 | D5 | D5